# Altium PCB FlowSensor.PcbDoc
Units mm, origin at the board's own origin, x right, y up, seen from the top; angles counter-clockwise.
Board outline 25.9 x 26.38 mm, 2 copper layers (Top Layer, Bottom Layer); 2 components, 8 nets, 26 pads, 0 vias.
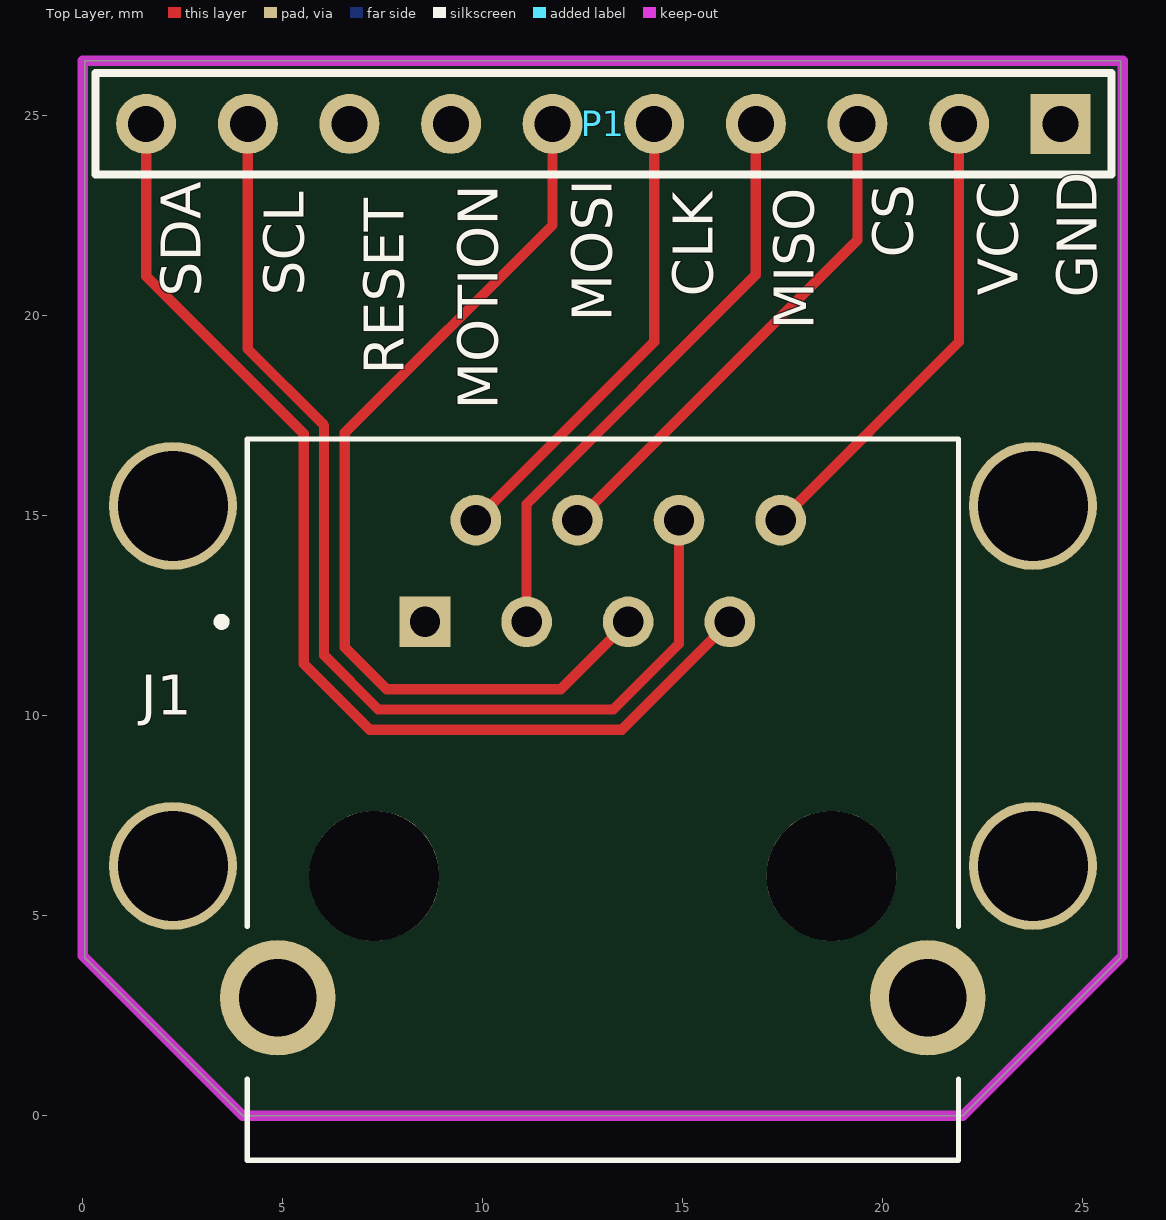
[diagram p0: Top Layer view]
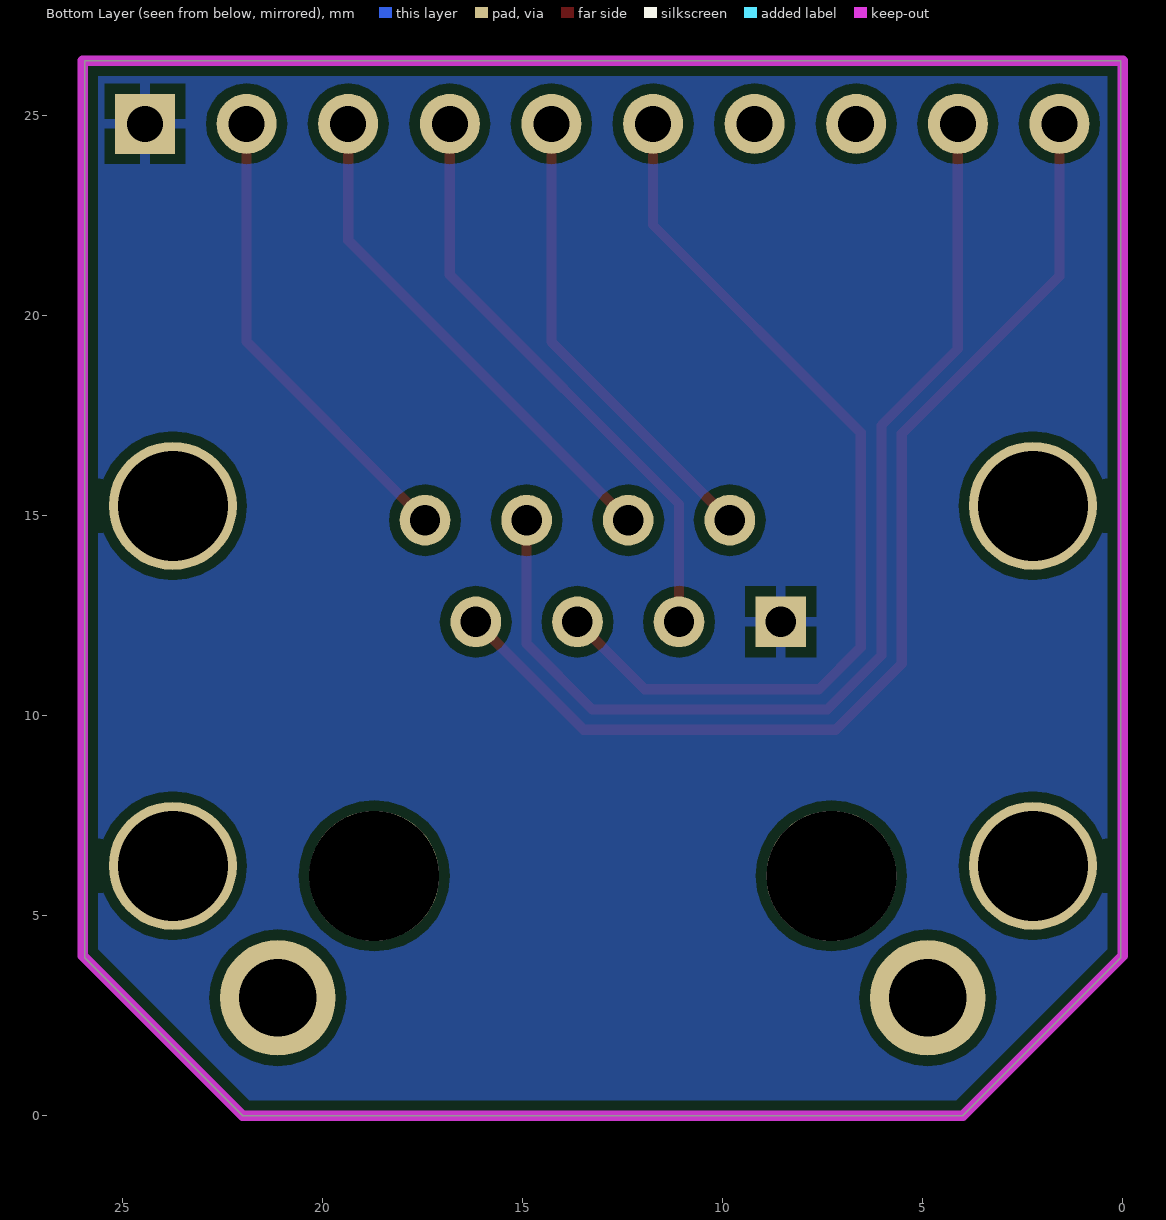
[diagram p1: Bottom Layer view, seen from below]

## Layer stack, top to bottom
Top Solder: solder mask 0.0102, Solder Resist, Dk 3.5
Top Layer: signal copper 0.0356
Dielectric 1: dielectric 0.32, FR-4, Dk 4.8
Bottom Layer: signal copper 0.0356
Bottom Solder: solder mask 0.0102, Solder Resist, Dk 3.5

## Board outline
0.05,9.75 0.05,3.95 4,0 22,0 25.95,3.95 25.95,10.75 25.95,26.375 0.05,26.375

## Design rules (kind name [scope] priority, off if disabled: settings)
Clearance [All] p1: gap=0.254 ignorepadtopadclearanceinfootprint=FALSE except(0: Arc-Hole Track-Hole SMDPad-Hole THPad-Hole Via-Hole Fill-Hole Poly-Hole Region-Hole Text-Hole)
HoleSize [All] p1: absolutevalues=TRUE maxlimit=3.5 minlimit=0.025 maxpercent=80.000 minpercent=20.000
MinimumSolderMaskSliver [All] p1: minsoldermaskwidth=0.1
PolygonConnect [All] p1: connectstyle=Relief reliefconductorwidth=0.254 reliefentries=4 polygonreliefangle="90 Angle" airgapwidth=0.254
RoutingVias [All] p1: holewidth=0.711 width=1.27 viastyle="Through Hole" minholewidth=0.711 minwidth=1.27 maxholewidth=0.711 maxwidth=1.27
SilkToSilkClearance [All] p1: silktosilkclearance=0.1
SilkToSolderMaskClearance [IsPad] p1: minsilkscreentomaskgap=0.1 clearancetoexposedcopper=TRUE
SolderMaskExpansion [All] p1: expansion=0.102
Width [All] p1: maxlimit=0.254 minlimit=0.254 preferedwidth=0.254
26 further rules are at their usual default settings.

## Components (designator, comment, footprint, x,y, rotation, side; value= is the part's Value field where it differs from the comment)
J1 "RJ45-8N-B" TE_RJ45-8N-B 13,6 r0 top
P1 "" HDR1X10 13.269,24.8 r180 top

## Footprints (in the part's own frame and the unit in brackets; to place one, negate y for a bottom-side part, rotate by r counter-clockwise, add the part's x,y. Pads: shape width x height; smd on the part's side, far side on the other; paste and mask are expansions set on the pad)
HDR1X10 [mm] "Connector; Header; 10 Position"
  rect 1.5x1.5 hole 0.9: 1(-11.176,0)
  round 1.5 hole 0.9: 2(-8.636,0) 3(-6.096,0) 4(-3.556,0) 5(-1.016,0) 6(1.524,0) 7(4.064,0) 8(6.604,0) 9(9.144,0) 10(11.684,0)
  silkscreen extent -12.45,-1.27 12.95,1.27, body extent -12.7,-1.27 13.2,1.27, height 8.5
TE_RJ45-8N-B [mm]
  rect 1.268x1.268 hole 0.76: 1(-4.445,6.35)
  round 1.268 hole 0.76: 2(-3.175,8.89) 3(-1.905,6.35) 4(-0.635,8.89) 5(0.635,6.35) 6(1.905,8.89) 7(3.175,6.35) 8(4.445,8.89)
  round 2.895 hole 1.93: 9(-8.125,-3.05) 10(8.125,-3.05)
  round 3.25 hole 3.25 unplated: None(-5.715,0) None(5.715,0)
  silkscreen extent -9.63,-7.11 8.89,10.92, body extent -8.89,-7.8 8.89,10.24, height 12.36

## Part data
J1: "Corcom; Filter; Signal Line; Modular; 8 Contacts; 1 Port Through Hole", Package=None, Supplier Part Number 1=CCM1500-ND, Availability=Good, MF="TE Connectivity", MP=RJ45-8N-B, Price="5.65 USD", SnapEDA_Link=https://www.snapeda.com/parts/RJ45-8N-B/TE%2520Connectivity%2520Corcom%2520Filters/view-part/?ref=snap, Supplier 1=Digi-Key
P1: library part "Header 10", "Header, 10-Pin", Supplier Part Number 1=952-1843-ND, LatestRevisionDate=17-Jul-2002, LatestRevisionNote="Re-released for DXP Platform.", Publisher="Altium Limited", Supplier 1=Digi-Key

## Free pads (board coordinates)
  round 3.2 hole 2.75: 1(2.25,6.25) 1(2.25,15.25) 1(23.75,6.25) 1(23.75,15.25)

## Nets (pads, with @x,y where several pads share a name; then routed paths per layer and width w, separated by ;. In a path a pad name is that pad's centre, name@x,y a point inside that pad or via, vN(x,y) a via of type N, cw(c..) or ccw(c..) an arc to the next point about the centre after c; other vN are vias at no path point)
GND: J1.1 P1.1
NetJ1_2: J1.2 P1.5 | length 11.8
  Top Layer w0.254: J1.2 14.285,19.35 P1.5
NetJ1_3: J1.3 P1.4 | length 14.8
  Top Layer w0.254: J1.3 11.095,15.295 16.825,21.025 P1.4
NetJ1_4: J1.4 P1.3 | length 12.8
  Top Layer w0.254: J1.4 19.365,21.89 P1.3
NetJ1_5: J1.5 P1.6 | length 23.5
  Top Layer w0.254: P1.6 11.745,22.27 6.55,17.075 6.55,11.712 7.596,10.666 11.951,10.666 J1.5
NetJ1_6: J1.6 P1.9 | length 27.3
  Top Layer w0.254: P1.9 4.125,19.168 6.033,17.26 6.033,11.51 7.385,10.158 13.265,10.158 14.905,11.798 J1.6
NetJ1_7: J1.7 P1.10 | length 27.6
  Top Layer w0.254: P1.10 1.585,20.99 5.525,17.05 5.525,11.3 7.175,9.65 13.475,9.65 J1.7
NetJ1_8: J1.8 P1.2 | length 11.8
  Top Layer w0.254: J1.8 21.905,19.35 P1.2
pads on no net: J1.9 J1.10 J1.None P1.7 P1.8

## Polygon pours and split planes (outlines as drawn)
GND on Bottom Layer "GND" (solid, pour order 1): 0.05,9.75 0.05,3.95 4,0 22,0 25.95,3.95 25.95,10.75 25.95,26.375 0.05,26.375

## Keep-outs
Keep-Out Layer:
  lines w0.254: 0,4 0,26.375 26,26.375 26,4 22,0 4,0 0,4

## Silkscreen, mask and mechanical layers (free items; w line width, h text height)
Top Overlay:
  text "CS" at 20.75,21.45 h1 r90
  text "SCL" at 5.525,20.5 h1 r90
  text "VCC" at 23.375,20.5 h1 r90
  text "SDA" at 2.95,20.475 h1 r90
  text "CLK" at 15.75,20.475 h1 r90
  text "GND" at 25.35,20.45 h1 r90
  text "MOSI" at 13.225,19.85 h1 r90
  text "MISO" at 18.275,19.65 h1 r90
  text "RESET" at 8.025,18.525 h1 r90
  text "MOTION" at 10.375,17.65 h1 r90